# EAGLE board SmartNixieTubeSpacer (EAGLE 6.1)
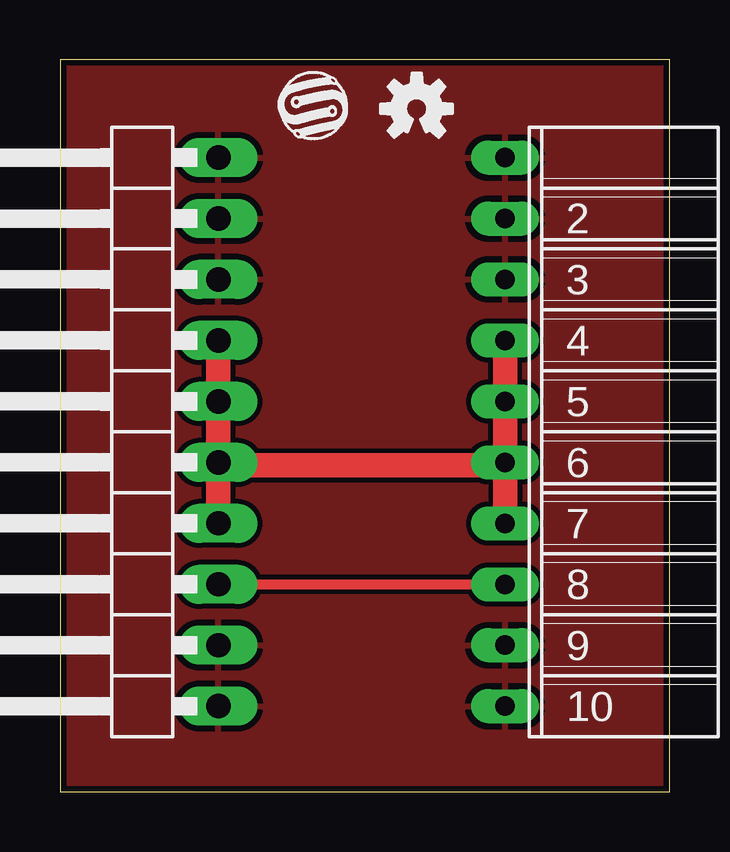
[diagram p0: board, top side]
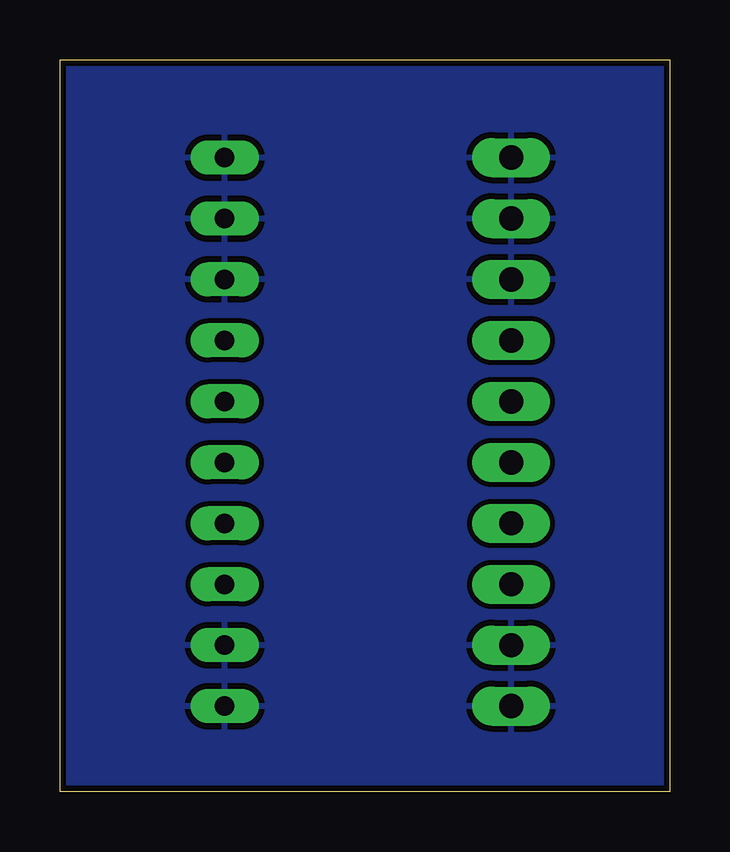
[diagram p1: board, bottom side, seen from below]

Size 25.41 x 30.48 mm. Coordinates in mm from the lower left corner, seen from the top.
Outline: 0,0 25.41,0 25.41,30.48 0,30.48 0,0
Copper layers (1*16): Top 0.035mm / dielectric 1.5mm / Bottom 0.035mm
Design rules: minimum track width 8mil, minimum drill 12mil, track to track 8mil, track to pad 8mil, pad to pad 8mil, via to via 8mil, smd to smd 8mil, copper to edge 10mil, drill to drill 6mil, minimum pad ring 12mil, minimum via ring 10mil, stop-mask expansion 4mil, vias tented up to drill 25mil, thermal gap 10mil

## Footprints (pad centres in the part's own frame; a part is rotated, then mirrored left to right if it is on the bottom)
1X10/90 = drill 1.016 long: 1 -11.43,-3.81; 2 -8.89,-3.81; 3 -6.35,-3.81; 4 -3.81,-3.81; 5 -1.27,-3.81; 6 1.27,-3.81; 7 3.81,-3.81; 8 6.35,-3.81; 9 8.89,-3.81; 10 11.43,-3.81
FE10W = drill 0.813 long: 1 -11.43,0; 2 -8.89,0; 3 -6.35,0; 4 -3.81,0; 5 -1.27,0; 6 1.27,0; 7 3.81,0; 8 6.35,0; 9 8.89,0; 10 11.43,0

## Placement (x,y rotation side)
JP3  [1X10/90]  2.79,14.99 90 top
SV1  [FE10W]  18.54,14.99 270 top
U$2  [OSHW-LOGO-S]  14.86,28.45 0 top
U$3  [SWITCHMODE_LOGO_S]  8.94,26.95 0 top

## Library data of the parts
JP3 = pinhead
SV1 = con-lsta_tyler; OC_FARNELL: unknown; OC_NEWARK: unknown
U$2 = SparkFun-Aesthetics
U$3 = SwitchmodeEagleLibrary

## Nets
9V: JP3.4 JP3.5 JP3.6 JP3.7 SV1.4 SV1.5 SV1.6 SV1.7
GND: JP3.1 JP3.2 JP3.8 JP3.9 JP3.10 SV1.1 SV1.2 SV1.3 SV1.9 SV1.10
TX_SS: JP3.3 SV1.8

## Tracks (layer width: path | path; a pad name or v marks a point on that pad's centre or on a via)
9V
  Top 0.203: 18.54,13.59 SV1.6 | 6.6,13.59 JP3.5
  Top 1.016: SV1.7 18.54,13.59 6.6,13.59 JP3.4 | SV1.6 SV1.5 SV1.4 | JP3.7 JP3.6 JP3.5
GND
  pour Bottom (isolate 0.203): 0,0 25.4,0 25.4,30.48 0,30.48
  pour Top (isolate 0.203): 0,0 25.4,0 25.4,30.48 0,30.48
TX_SS
  Top 0.406: JP3.3 SV1.8

## Text on the board
bValues: 1